# Allegro board EXTN.brd
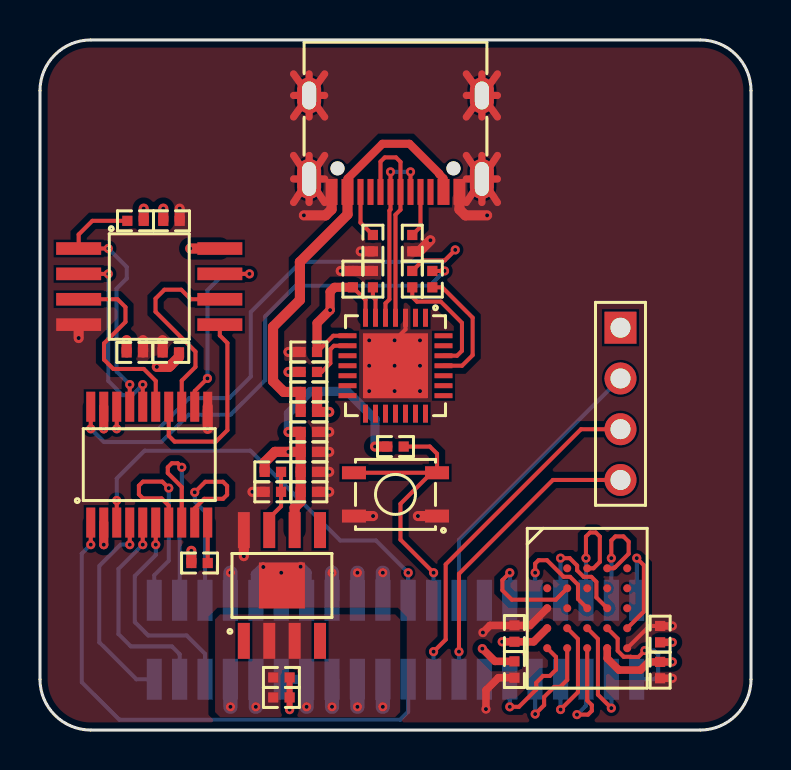
[diagram p0: board, top side]
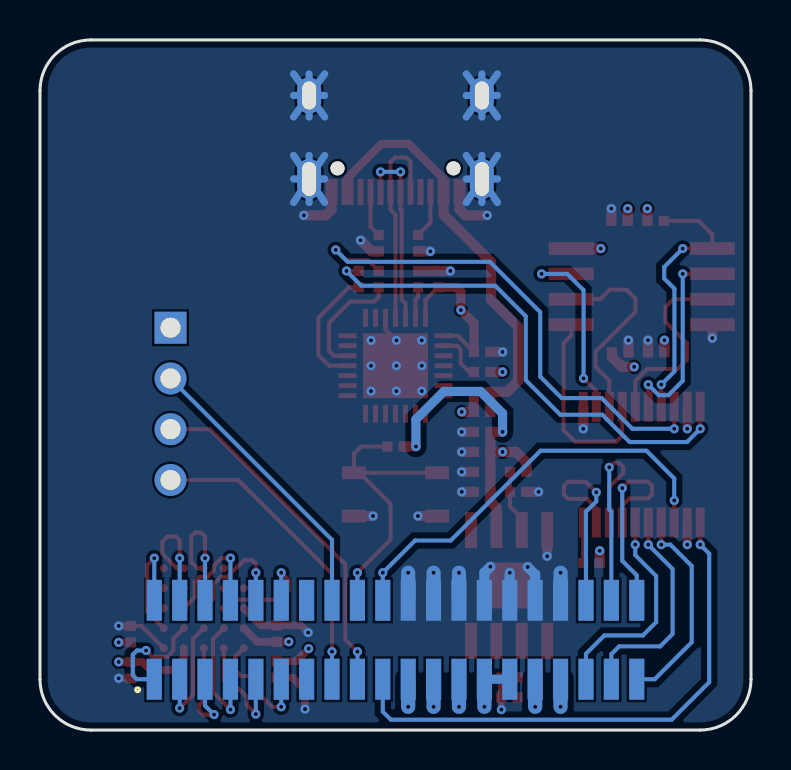
[diagram p1: board, bottom side, seen from below]

Outline 35.56 x 34.54 mm; copper layers: TOP, GND02, PWR03, BOTTOM. Coordinates in mm from the lower left corner of the outline.
Outline path: 0,32 0,2.54 arc(0.74,0.74) 2.54,0 33.02,0 arc(34.82,0.74) 35.56,2.54 35.56,32 arc(34.82,33.8) 33.02,34.54 2.54,34.54 arc(0.74,33.8) 0,32

## Design rules (mm)
net group 3V3_PL_UART_DIFF: nets 3V3_PL_UART_DN 3V3_PL_UART_DP
net group MG_3V3_FLASH: nets 3V3_PL_FLASH_CLK 3V3_PL_FLASH_HOLD 3V3_PL_FLASH_MISO 3V3_PL_FLASH_MOSI 3V3_PL_FLASH_WP
net group MG_FLASH: nets B35_L3_N B35_L3_P B35_L7_N B35_L7_P B35_L8_N B35_L8_P
net group MG_PSRAM: nets B35_L10_N B35_L10_P B35_L13_N B35_L13_P B35_L15_N B35_L15_P B35_L16_N B35_L16_P B35_L17_N B35_L17_P B35_L18_N B35_L18_P

## Placement (name value [footprint] x y rotation side)
C1  0.1uF  [C0402]  13.45 12.92 0 top
C2  0.1uF  [C0402]  13.45 11.92 0 top
C3  10uF  [C0402]  13.45 14.92 0 top
C4  1uF  [C0402]  12.07 2.63 0 top
C5  10uF  [C0402]  13.45 13.92 0 top
C6  10uF  [C0402]  12.07 1.63 0 top
C7  0.1uF  [C0402]  13.45 18.93 180 top
C8  1uF  [C0402]  15.65 22.57 90 top
C9  0.1uF  [C0402]  16.65 22.57 90 top
C10  0.1uF  [C0402]  31.01 3 270 top
C11  0.1uF  [C0402]  23.73 4.83 90 top
C12  10uF  [C0402]  31.01 4.8 90 top
C13  10uF  [C0402]  23.73 3.03 270 top
C14  0.1uF  [C0402]  6.58 25.49 0 top
C15  0.1uF  [C0402]  4.74 18.9 180 top
C16  0.1uF  [C0402]  6.54 18.9 180 top
J1  EXTN  [HDR4X1-2R54-TM-VM]  29.03 20.14 270 top
J2  USB_PL_UART  [USB-TYPEC-12-SM]  17.78 29.35 180 top
J3  PL_EXTN  [HDR20X2-1R27-SM-VF]  17.78 4.52 180 bottom
R1  26K  [R0402]  11.65 12.92 0 top
R2  0R  [R0402]  13.45 15.92 0 top
R3  0R  [R0402]  13.45 16.92 0 top
R4  10K  [R0402]  11.65 11.92 180 top
R5  0R  [R0402]  19.62 22.57 90 top
R6  0R  [R0402]  18.62 22.57 90 top
R7  10K  [R0402]  17.78 14.19 180 top
R8  4.7K  [R0402]  13.45 17.93 0 top
R9  5.1K  [R0402]  18.62 24.37 90 top
R10  5.1K  [R0402]  16.65 24.37 270 top
R11  10K  [R0402]  4.78 25.49 180 top
R12  4.7K  [R0402]  7.98 8.36 0 top
SW1  PL-KEY  [SW-4-1R20X0R65-SM]  17.78 11.79 180 top
U1  RT2515H  [SOIC-8-1R80X0R60-THRM]  12.1 7.24 0 top
U2  CP2102  [QFN-28-0R90X0R25]  17.78 18.24 270 top
U3  APS51208N-OBR  [BGA-24-0R40-8R00X6R00]  27.37 6.1 0 top
U4  W25Q128JVSIQ  [SOIC-8-2R25X0R63]  5.46 22.2 270 top
U5  TXS0108E  [TSSOP-20-1R50X0R45]  5.46 13.29 90 top

## Library data of the parts
C1-C16 = CAPACITOR-NON-POL
J1 = HEADER-4X1
J2 = USB_TYPEC
J3 = HEADER-20X2
R1-R12 = RESISTOR
SW1 = SW-KEY-4
U1 = RT2515H
U2 = CP2102
U3 = APS51208N-OBR
U4 = W25Q128JVSIQ
U5 = TXS0108E

## Footprints (pads in the part's own frame, mm; a bottom-side part is the same pattern mirrored in y, then rotated)
BGA-24-0R40-8R00X6R00
  round 0.4 smd: A2(-1,2) A3(0,2) A4(1,2) A5(2,2) B1(-2,1) B2(-1,1) B3(0,1) B4(1,1) B5(2,1) C1(-2,0) C2(-1,0) C3(0,0) C4(1,0) C5(2,0) D1(-2,-1) D2(-1,-1) D3(0,-1) D4(1,-1) D5(2,-1) E1(-2,-2) E2(-1,-2) E3(0,-2) E4(1,-2) E5(2,-2)
C0402
  rect 0.51x0.51 smd: 1(-0.41,0) 2(0.41,0)
HDR4X1-2R54-TM-VM
  rect 1.6x1.6 hole 1: 1(0,0)
  round 1.6 hole 1: 2(2.54,0) 3(5.08,0) 4(7.62,0)
HDR20X2-1R27-SM-VF
  rect 0.76x2.05 smd: 1(-12.065,-1.975) 2(-12.065,1.975) 3(-10.795,-1.975) 4(-10.795,1.975) 5(-9.525,-1.975) 6(-9.525,1.975) 7(-8.255,-1.975) 8(-8.255,1.975) 9(-6.985,-1.975) 10(-6.985,1.975) 11(-5.715,-1.975) 12(-5.715,1.975) 13(-4.445,-1.975) 14(-4.445,1.975) 15(-3.175,-1.975) 16(-3.175,1.975) 17(-1.905,-1.975) 18(-1.905,1.975) 19(-0.635,-1.975) 20(-0.635,1.975) 21(0.635,-1.975) 22(0.635,1.975) 23(1.905,-1.975) 24(1.905,1.975) 25(3.175,-1.975) 26(3.175,1.975) 27(4.445,-1.975) 28(4.445,1.975) 29(5.715,-1.975) 30(5.715,1.975) 31(6.985,-1.975) 32(6.985,1.975) 33(8.255,-1.975) 34(8.255,1.975) 35(9.525,-1.975) 36(9.525,1.975) 37(10.795,-1.975) 38(10.795,1.975) 39(12.065,-1.975) 40(12.065,1.975)
QFN-28-0R90X0R25
  rect 0.9x0.25 smd: 1(-2.4,1.5) 2(-2.4,1) 3(-2.4,0.5) 4(-2.4,0) 5(-2.4,-0.5) 6(-2.4,-1) 7(-2.4,-1.5) 15(2.4,-1.5) 16(2.4,-1) 17(2.4,-0.5) 18(2.4,0) 19(2.4,0.5) 20(2.4,1) 21(2.4,1.5)
  rect 0.25x0.9 smd: 8(-1.5,-2.4) 9(-1,-2.4) 10(-0.5,-2.4) 11(0,-2.4) 12(0.5,-2.4) 13(1,-2.4) 14(1.5,-2.4) 22(1.5,2.4) 23(1,2.4) 24(0.5,2.4) 25(0,2.4) 26(-0.5,2.4) 27(-1,2.4) 28(-1.5,2.4)
  rect 3.25x3.25 smd: 29(0,0)
R0402
  rect 0.51x0.51 smd: 1(-0.41,0) 2(0.41,0)
SOIC-8-1R80X0R60-THRM
  rect 0.6x1.8 smd: 1(-1.905,-2.772) 2(-0.635,-2.772) 3(0.635,-2.772) 4(1.905,-2.772) 5(1.905,2.772) 6(0.635,2.772) 7(-0.635,2.772) 8(-1.905,2.772)
  rect 2.3x2.3 smd: 9(0,0)
SOIC-8-2R25X0R63
  rect 0.63x2.25 smd: 1(-1.905,-3.53) 2(-0.635,-3.53) 3(0.635,-3.53) 4(1.905,-3.53) 5(1.905,3.53) 6(0.635,3.53) 7(-0.635,3.53) 8(-1.905,3.53)
SW-4-1R20X0R65-SM
  rect 1.2x0.65 smd: 1(-2.078,1.083) 2(2.077,1.083) 3(-2.078,-1.083) 4(2.077,-1.083)
TSSOP-20-1R50X0R45
  rect 1.5x0.45 smd: 1(-2.9,2.925) 2(-2.9,2.275) 3(-2.9,1.625) 4(-2.9,0.975) 5(-2.9,0.325) 6(-2.9,-0.325) 7(-2.9,-0.975) 8(-2.9,-1.625) 9(-2.9,-2.275) 10(-2.9,-2.925) 11(2.9,-2.925) 12(2.9,-2.275) 13(2.9,-1.625) 14(2.9,-0.975) 15(2.9,-0.325) 16(2.9,0.325) 17(2.9,0.975) 18(2.9,1.625) 19(2.9,2.275) 20(2.9,2.925)
USB-TYPEC-12-SM
  oval 1.2x2 hole 0.7x1.7: 1(-4.32,1.765) 2(4.32,1.765)
  oval 1.2x1.8 hole 0.7x1.4: 3(-4.32,-2.415) 4(4.32,-2.415)
  round 0.71 hole 0.7: 5(-2.9,1.235) 6(2.9,1.235)
  rect 0.6x1.3 smd: A1B12(-3.2,2.415) A4B9(-2.4,2.415) B1A12(3.2,2.415) B4A9(2.4,2.415)
  rect 0.3x1.3 smd: A5(-1.25,2.415) A6(-0.25,2.415) A7(0.25,2.415) A8(1.25,2.415) B5(1.75,2.415) B6(0.75,2.415) B7(-0.75,2.415) B8(-1.75,2.415)

## Nets
3V3_PL_FLASH_CLK: U4.6(CLK) U5.13(B7)
3V3_PL_FLASH_CS: R11.2 U4.1(C\S\) U5.17(B3)
3V3_PL_FLASH_HOLD: U4.7(H\O\L\D\) U5.12(B8)
3V3_PL_FLASH_MISO: U4.2(DO) U5.16(B4)
3V3_PL_FLASH_MOSI: U4.5(DI) U5.14(B6)
3V3_PL_FLASH_WP: U4.3(W\P\) U5.15(B5)
3V3_PL_UART_DN: J2.A7(DN1) J2.B7(DN2) U2.5(D-)
3V3_PL_UART_DP: J2.A6(DP1) J2.B6(DP2) U2.4(D+)
3V3_PL_UART_RX: R6.2 U5.18(B2)
3V3_PL_UART_TX: R5.2 U5.20(B1)
GND: C1.2 C2.2 C3.2 C4.2 C5.2 C6.2 C7.2 C8.2 C9.2 C10.2 C11.2 C12.2 C13.2 C14.2 C15.1 C16.2 J2.1(EP1) J2.2(EP2) J2.3(EP3) J2.4(EP4) J2.A1B12(GND#A1B12) J2.B1A12(GND#B1A12) J3.22 J3.24 J3.26 J3.28 J3.30 J3.32 J3.34 R4.2 R9.1 R10.2 SW1.1 SW1.2 U1.8(GND#8) U1.9(GND#9) U2.3(GND#3) U2.29(GND#29) U3.C1(VSS#C1) U3.E5(VSS#E5) U4.4(GND) U5.11(GND)
VCC_1V8: C1.1 C2.1 C3.1 C5.1 C10.1 C11.1 C12.1 C13.1 C15.2 R1.1 R7.2 R12.1 U1.6(VOUT) U3.D1(VDD#D1) U3.E4(VDD#E4) U5.2(VCCA)
VCC_3V3: C4.1 C6.1 C14.1 C16.1 J3.21 J3.23 J3.25 J3.27 J3.29 J3.31 J3.33 R11.1 U1.2(EN) U1.3(VIN) U4.8(VCC) U5.19(VCCB)
B35_L3_N: J3.37 U5.5(A4)
B35_L3_P: J3.38 U5.8(A7)
B35_L7_N: J3.39 U5.4(A3)
B35_L7_P: J3.40 U5.7(A6)
B35_L8_N: J3.35 U5.6(A5)
B35_L8_P: J3.36 U5.9(A8)
B35_L9_N: J1.3 J3.17
B35_L9_P: J3.18 R7.1 SW1.3 SW1.4
B35_L10_N: J3.12 U3.B2(CLK)
B35_L10_P: J3.11 U3.E1(ADQ7)
B35_L11_N: J1.4 J3.15
B35_L11_P: J1.2 J3.16
B35_L12_N: J3.19 U5.1(A1)
B35_L12_P: J3.20 U5.3(A2)
B35_L13_N: J3.10 U3.C3(DQS/DM)
B35_L13_P: J3.9 U3.E2(ADQ6)
B35_L15_N: J3.4 U3.A4(R\S\T\)
B35_L15_P: J3.3 U3.D3(ADQ0)
B35_L16_N: J3.6 U3.A3(C\E\)
B35_L16_P: J3.5 U3.E3(ADQ5)
B35_L17_N: J3.8 U3.C4(ADQ2)
B35_L17_P: J3.7 U3.D2(ADQ1)
B35_L18_N: J3.2 U3.D5(ADQ4)
B35_L18_P: J3.1 U3.D4(ADQ3)
PL_UART_VBUS: J2.A4B9(VBUS#A4B9) J2.B4A9(VBUS#B4A9) R2.1 R3.1
N624567: R1.2 R4.1 U1.7(ADJ)
N1096893: R12.2 U5.10(OE)
N1592788: C7.1 C8.1 R2.2 R3.2 R8.1 U2.7(REGIN) U2.8(VBUS)
N1592792: R8.2 U2.9(R\S\T\)
N1592870: R5.1 U2.25(RXD)
N1593010: R6.1 U2.26(TXD)
N1593134: C9.1 U2.6(VDD)
N1593294: J2.B5(CC2) R10.1
N1593302: J2.A5(CC1) R9.2

Pads without a net: J1 1; J2 5 6 A8 B8; J3 13 14; U1 1 4 5; U2 1 2 10 11 12 13 14 15 16 17 18 19 20 21 22 23 24 27 28; U3 A2 A5 B1 B3 B4 B5 C2 C5

## Via types
v1: diameter 0.457, hole 0.203, TOP to BOTTOM, 100 vias

## Routing (per net, layer and track width the routed paths; a pad name or vN(x,y) marks a point on that pad's centre or on a via; arc(x,y) is an arc through that point)
3V3_PL_FLASH_CLK: length 10.1
  TOP w0.203: U5.13 7.09,17.49 7.77,18.18 7.77,18.94 5.78,20.94 5.78,21.6 6.22,22.04 7.07,22.04 7.55,21.56 U4.6
3V3_PL_FLASH_CS: length 13.7
  TOP w0.203: U5.17 v1(4.49,17.29) ; R11.2 2.62,25.49 1.93,24.81 U4.1 v1(3.41,24.1)
  BOTTOM w0.203: v1(3.41,24.1) 4.34,23.18 4.34,22.6 3.83,22.09 3.83,17.95 v1(4.49,17.29)
3V3_PL_FLASH_HOLD: length 10
  TOP w0.203: v1(8.37,17.6) 7.74,16.97 U5.12 ; U4.7 v1(10.47,22.83)
  BOTTOM w0.203: v1(10.47,22.83) 9.19,22.83 8.37,22.02 v1(8.37,17.6)
3V3_PL_FLASH_MISO: length 10.2
  TOP w0.203: U4.2 v1(3.41,22.83) ; U5.16 v1(5.14,17.29)
  BOTTOM w0.203: v1(3.41,22.83) 3.41,17.48 4.13,16.76 4.61,16.76 v1(5.14,17.29)
3V3_PL_FLASH_MOSI: length 10.2
  TOP w0.203: U5.14 6.44,14.73 6.73,14.44 8.8,14.44 9.37,15.01 9.37,19.37 8.99,19.75 U4.5
3V3_PL_FLASH_WP: length 9.9
  TOP w0.203: U4.3 3.88,21.56 4.27,21.17 4.27,20.43 3.2,19.36 3.2,18.54 3.67,18.07 5.19,18.07 5.79,17.48 U5.15
3V3_PL_UART_DN: length 9.4
  TOP w0.203: v1(17.53,27.94) J2.A7 17.53,26.06 17.48,26 17.48,21.56 17.28,21.36 U2.5 ; J2.B7 v1(18.53,27.94)
  BOTTOM w0.203: v1(17.53,27.94) v1(18.53,27.94)
3V3_PL_UART_DP: length 10.6
  TOP w0.203: U2.4 17.78,25.8 18.03,26.05 J2.A6 18.03,28.44 17.81,28.66 17.24,28.66 17.03,28.45 J2.B6
3V3_PL_UART_RX: length 26.2
  TOP w0.203: U5.18 v1(3.84,15.08) ; R6.2 19.15,23.51 20.25,23.51 v1(20.77,24.03)
  BOTTOM w0.203: v1(3.84,15.08) 5.93,15.08 7.47,16.62 9.47,16.62 10.54,17.69 10.54,20.92 13.06,23.44 20.17,23.44 v1(20.77,24.03)
3V3_PL_UART_TX: length 25.1
  TOP w0.203: U5.20 v1(2.54,15.08) ; R5.2 v1(20.23,22.98)
  BOTTOM w0.203: v1(20.23,22.98) 19.49,22.24 12.8,22.24 11.26,20.71 11.26,17.51 9.53,15.78 7.43,15.78 6.07,14.42 3.2,14.42 v1(2.54,15.08)
GND: length 153.4
  TOP w0.203: U2.3 18.28,20.05 v1(17.74,19.51) ; U3.E5 30.48,5.21 C12.2
  TOP w0.305: C4.2 C6.2 v1(12.48,1.02)
  TOP w0.356: J2.2 14.24,27.59 ; J2.2 12.68,26.41 ; J2.2 12.68,27.59 ; J2.2 13.46,26.41 ; J2.2 12.68,28.76 ; J2.2 14.24,26.41 ; J2.2 13.46,28.76 ; J2.2 14.24,28.76 ; J2.3 22.88,31.77 ; J2.3 22.1,32.84 ; J2.3 21.32,31.77 ; J2.3 21.32,30.69 ; J2.3 22.88,30.69 ; J2.3 22.88,32.84 ; J2.3 21.32,32.84 ; J2.3 22.1,30.69 ; 12.68,31.77 J2.4 ; J2.4 13.46,32.84 ; J2.4 14.24,32.84 ; J2.4 14.24,31.77 ; J2.4 14.24,30.69 ; J2.4 12.68,32.84 ; J2.4 12.68,30.69 ; J2.4 13.46,30.69 ; J2.1 22.88,28.76 ; J2.1 21.32,26.41 ; J2.1 22.1,26.41 ; J2.1 22.88,27.59 ; J2.1 22.88,26.41 ; J2.1 22.1,28.76 ; J2.1 21.32,28.76 ; J2.1 21.32,27.59
  TOP w0.381: U3.C1 24.51,5.24 C11.2 22.51,5.24 v1(22.15,4.88) ; C12.2 v1(31.62,5.21) ; v1(22.3,1.05) 22.3,1.99 22.93,2.62 C13.2 ; C10.2 v1(31.62,2.59)
  TOP w0.508: C7.2 v1(12.43,18.93) ; U4.4 v1(1.93,19.62) ; C15.1 v1(5.15,19.51) ; C16.2 v1(6.13,19.51) ; C14.2 v1(6.99,26.1) ; C2.2 v1(14.47,11.92) ; C9.2 C8.2 v1(15.04,22.98) ; R10.2 v1(16.04,23.96) ; J2.A1B12 20.98,26.06 21.27,25.76 v1(22.36,25.76) ; U5.11 v1(8.39,15.08) ; J2.B1A12 14.58,26.06 14.29,25.76 v1(13.2,25.76) ; R9.1 18.97,23.96 v1(19.53,24.52) ; C5.2 v1(14.47,13.92) ; SW1.2 v1(16.66,10.71) ; C1.2 v1(14.47,12.92) ; C3.2 v1(14.47,14.92) ; R4.2 v1(10.63,11.92) ; SW1.1 v1(18.9,10.71) ; U1.8 v1(10.19,8.7)
  GND02 w0.356: 22.1,30.69 J2.3 ; J2.3 22.88,32.84 ; J2.3 22.88,31.77 ; J2.3 22.1,32.84 ; J2.3 22.88,30.69 ; J2.3 21.32,32.84 ; J2.3 21.32,31.77 ; J2.3 21.32,30.69 ; 12.68,26.41 J2.2 ; J2.2 14.24,28.76 ; J2.2 14.24,26.41 ; J2.2 13.46,26.41 ; J2.2 12.68,28.76 ; J2.2 13.46,28.76 ; J2.2 12.68,27.59 ; J2.2 14.24,27.59 ; 22.1,26.41 J2.1 ; J2.1 22.88,26.41 ; J2.1 21.32,26.41 ; J2.1 21.32,28.76 ; J2.1 22.1,28.76 ; J2.1 22.88,28.76 ; J2.1 21.32,27.59 ; J2.1 22.88,27.59 ; J2.4 14.24,30.69 ; J2.4 13.46,32.84 ; J2.4 12.68,31.77 ; J2.4 13.46,30.69 ; J2.4 14.24,31.77 ; J2.4 12.68,32.84 ; J2.4 12.68,30.69 ; J2.4 14.24,32.84
  BOTTOM w0.356: J2.2 14.24,28.76 ; J2.2 13.46,26.41 ; J2.2 14.24,27.59 ; J2.2 14.24,26.41 ; J2.2 12.68,26.41 ; J2.2 12.68,27.59 ; J2.2 13.46,28.76 ; J2.2 12.68,28.76 ; 21.32,32.84 J2.3 ; J2.3 21.32,31.77 ; J2.3 22.1,30.69 ; J2.3 21.32,30.69 ; J2.3 22.88,31.77 ; J2.3 22.88,30.69 ; J2.3 22.88,32.84 ; J2.3 22.1,32.84 ; J2.1 22.88,28.76 ; J2.1 21.32,28.76 ; J2.1 21.32,26.41 ; J2.1 21.32,27.59 ; J2.1 22.88,27.59 ; J2.1 22.1,28.76 ; J2.1 22.1,26.41 ; J2.1 22.88,26.41 ; 12.68,32.84 J2.4 ; J2.4 14.24,31.77 ; J2.4 14.24,32.84 ; J2.4 13.46,30.69 ; J2.4 13.46,32.84 ; J2.4 14.24,30.69 ; J2.4 12.68,30.69 ; J2.4 12.68,31.77
  BOTTOM w0.508: J3.32 10.79,7.79 v1(11.17,8.16) ; v1(13.03,8.18) 13.34,7.88 J3.28 ; 12.06,6.49 v1(12.06,7.87)
  BOTTOM w0.711: J3.24 v1(15.88,7.87) ; J3.34 v1(9.53,7.87) ; J3.26 v1(14.61,7.87) ; J3.22 v1(17.14,7.87)
  vias: v1(16.47,19.51) v1(16.47,18.24) v1(16.47,16.97) v1(17.74,18.24) v1(17.74,16.97) v1(19.01,19.51) v1(19.01,18.24) v1(19.01,16.97)
VCC_1V8: length 76.7
  TOP w0.381: v1(23.12,4.42) C11.1 24.69,4.42 U3.D1 ; v1(22.12,4.07) 22.76,3.44 C13.1 ; U3.E4 28.37,3.59 28.95,3 30.03,3 30.44,3.41 C10.1 v1(31.62,3.41) ; C12.1 v1(31.62,4.39)
  TOP w0.457: U5.2 v1(3.19,9.28)
  TOP w0.508: R12.1 v1(7.57,8.97) ; C5.1 C1.1 C2.1 13.04,11.44 12.73,11.14 U1.6 ; C5.1 v1(12.43,13.92) 11.75,13.92 11.24,13.41 R1.1 ; C5.1 C3.1 v1(12.43,14.92) ; C15.2 v1(4.33,19.51) ; R7.2 v1(16.76,14.19)
  PWR03 w0.457: v1(4.33,19.51) 1.92,17.1 1.92,11.13 3.19,9.86 v1(3.19,9.28) 4.23,8.24 6.84,8.24 v1(7.57,8.97) 9.15,8.97 12.43,12.25 v1(12.43,13.92) ; v1(31.62,3.41) v1(31.62,4.39) 31.04,4.39 30.35,5.08 23.78,5.08 v1(23.12,4.42) 22.77,4.07 v1(22.12,4.07) 21.23,4.96 21.23,10.6 17.64,14.19 v1(16.76,14.19)
  BOTTOM w0.457: v1(16.76,14.19) 16.76,15.55 15.36,16.95 13.52,16.95 12.43,15.85 v1(12.43,14.92)
VCC_3V3: length 14.9
  TOP w0.457: U5.19 v1(3.19,15.08)
  TOP w0.508: U4.8 v1(7.51,24.1) ; R11.1 v1(5.19,26.1) ; C16.1 6.95,18.68 6.55,18.27 6.54,18.27 6.45,18.18 v1(5.84,18.18) ; C14.1 v1(6.17,26.1)
  BOTTOM w0.457: 12.06,2.54 J3.27
  BOTTOM w0.711: J3.23 v1(15.88,1.16) ; J3.33 v1(9.53,1.16) ; J3.27 v1(13.34,1.16) ; J3.21 v1(17.14,1.16) ; J3.25 v1(14.61,1.16) ; J3.31 v1(10.79,1.16)
B35_L3_N: length 10.8
  TOP w0.203: U5.5 v1(5.14,9.28)
  BOTTOM w0.203: v1(5.14,9.28) 3.93,8.07 3.93,4.8 4.54,4.19 6.6,4.19 6.99,3.8 6.99,2.54
B35_L3_P: length 10.6
  TOP w0.203: v1(7.09,13.15) 7.09,13.15 6.89,13.36 6.59,13.36 6.39,13.15 6.39,12.87 7.09,12.17 U5.8
  BOTTOM w0.203: v1(7.09,13.15) 7.09,11.03 6.99,10.93 6.99,6.49
B35_L7_N: length 10.4
  TOP w0.203: U5.4 v1(4.49,9.28)
  BOTTOM w0.203: v1(4.49,9.28) 4.03,9.28 2.97,8.22 2.97,4.39 4.81,2.54 J3.39
B35_L7_P: length 10.6
  TOP w0.203: U5.7 6.44,11.23 6.08,11.59 5.15,11.59 4.95,11.8 4.95,12.23 5.15,12.44 6.12,12.44 v1(6.44,12.11)
  BOTTOM w0.203: v1(6.44,12.11) 6.44,8.47 5.71,7.75 J3.40
B35_L8_N: length 10.9
  TOP w0.203: U5.6 v1(5.79,9.28)
  BOTTOM w0.203: J3.35 8.26,3.82 7.34,4.73 5.41,4.73 4.74,5.4 4.74,7.71 5.79,8.76 v1(5.79,9.28)
B35_L8_P: length 10.6
  TOP w0.203: v1(7.74,11.9) 8.27,12.43 9.15,12.43 9.36,12.22 9.36,11.78 9.16,11.58 8.21,11.58 7.74,11.1 U5.9
  BOTTOM w0.203: J3.36 8.26,10.93 7.74,11.44 v1(7.74,11.9)
B35_L9_N: length 17.5
  TOP w0.203: J1.3 27.06,15.06 20.29,8.29 20.29,4.53 v1(19.68,3.92)
  BOTTOM w0.203: 19.68,2.54 v1(19.68,3.92)
B35_L9_P: length 14.6
  TOP w0.203: 19.58,12.88 18.03,11.32 18.03,9.53 v1(19.68,7.87) ; 19.58,12.88 SW1.4 ; 19.58,12.88 SW1.3 19.86,13.83 19.5,14.19 R7.1
  BOTTOM w0.203: 19.68,6.49 v1(19.68,7.87)
B35_L10_N: length 6.1
  TOP w0.203: U3.B2 25.8,6.53 23.6,6.53 23.13,7 23.13,7.5 v1(23.5,7.87)
  BOTTOM w0.203: J3.12 v1(23.5,7.87)
B35_L10_P: length 5.9
  TOP w0.203: v1(23.5,1.16) 23.95,1.16 24.82,2.03 24.82,2.37 25.16,2.71 25.5,2.71 25.81,3.02 25.81,3.66 U3.E1
  BOTTOM w0.203: J3.11 v1(23.5,1.16)
B35_L11_N: length 15.3
  TOP w0.203: v1(20.95,3.92) 20.95,7.82 25.65,12.52 J1.4
  BOTTOM w0.203: J3.15 v1(20.95,3.92)
B35_L11_P: length 14.5
  BOTTOM w0.203: J3.16 20.95,9.52 J1.2
B35_L12_N: length 27.1
  TOP w0.203: U5.1 v1(2.54,9.28)
  BOTTOM w0.203: J3.19 18.41,0.92 18.01,0.52 3.97,0.52 2.09,2.4 2.09,8.83 v1(2.54,9.28)
B35_L12_P: length 21.3
  TOP w0.203: U5.3 v1(3.84,11.49)
  BOTTOM w0.203: J3.20 v1(18.41,7.87) 16.8,9.49 15.02,9.49 10.52,13.98 5.23,13.98 3.84,12.59 v1(3.84,11.49)
B35_L13_N: length 5.9
  TOP w0.203: U3.C3 26.91,6.56 26.91,7.27 26.51,7.67 26.19,7.67 25.36,8.5 24.93,8.5 24.77,8.33 v1(24.77,7.87)
  BOTTOM w0.203: J3.10 v1(24.77,7.87)
B35_L13_P: length 5.9
  TOP w0.203: U3.E2 26.37,2.51 26.02,2.16 25.72,2.16 25.21,1.66 25.21,1.25 v1(24.77,0.8)
  BOTTOM w0.203: J3.9 v1(24.77,0.8)
B35_L15_N: length 6
  TOP w0.203: U3.A4 28.69,8.1 28.74,8.15 28.76,8.15 29.44,8.82 29.44,9.43 29.18,9.69 28.78,9.69 28.57,9.49 v1(28.57,8.61)
  BOTTOM w0.203: J3.4 v1(28.57,8.61)
B35_L15_P: length 5.9
  TOP w0.203: U3.D3 27.9,4.56 27.9,1.77 v1(28.57,1.1)
  BOTTOM w0.203: J3.3 v1(28.57,1.1)
B35_L16_N: length 6.1
  TOP w0.203: 27.3,8.6 v1(27.3,8.61) 27.3,9.68 27.51,9.89 27.8,9.89 28,9.68 28,8.41 27.68,8.1 U3.A3
  BOTTOM w0.203: J3.6 v1(27.3,8.61)
B35_L16_P: length 6
  TOP w0.203: v1(26.86,0.77) 27.41,0.77 27.6,0.96 27.6,1.25 27.37,1.48 U3.E3
  BOTTOM w0.203: J3.5 27.3,1.22 v1(26.86,0.77)
B35_L17_N: length 6.1
  TOP w0.203: U3.C4 27.83,6.64 27.83,7.42 27.58,7.67 27.19,7.67 26.86,7.99 26.86,8.23 26.49,8.61 v1(26.04,8.61)
  BOTTOM w0.203: J3.8 v1(26.04,8.61)
B35_L17_P: length 6.2
  TOP w0.203: v1(26.04,1.03) 26.9,1.9 26.9,4.56 U3.D2
  BOTTOM w0.203: J3.7 v1(26.04,1.03)
B35_L18_N: length 6.1
  TOP w0.203: v1(29.84,8.61) 30.2,8.25 30.2,5.93 U3.D5
  BOTTOM w0.203: J3.2 v1(29.84,8.61)
B35_L18_P: length 5.9
  TOP w0.203: v1(30.25,3.98) 29.93,3.66 29.56,3.66 29.55,3.67 29.19,3.67 28.89,3.97 28.89,4.57 U3.D4
  BOTTOM w0.203: v1(30.25,3.98) 30.71,3.98 30.92,3.77 30.92,2.75 30.72,2.54 J3.1
PL_UART_VBUS: length 21.2
  TOP w0.406: J2.A4B9 20.18,27.61 19.97,27.82 19.97,27.85 18.48,29.34 17.13,29.34 15.38,27.6 J2.B4A9
  TOP w0.508: R2.1 R3.1 12.2,16.92 11.65,17.47 11.65,20.18 13,21.53 13,23.43 15.38,25.81 J2.B4A9
N624567: length 3.2
  TOP w0.203: R1.2 R4.1 12.06,11.2 11.46,10.61 U1.7
N1096893: length 2
  TOP w0.203: U5.10 R12.2
N1592788: length 18.7
  TOP w0.203: C8.1 16.28,21.53 U2.7 ; C7.1 14.67,19.74 U2.8
  TOP w0.457: C8.1 14.73,22.16 14.51,21.94 v1(14.51,21.02) 13.86,20.37 C7.1
  TOP w0.508: R3.2 R2.2 v1(14.47,15.92) ; R8.1 v1(12.43,17.93)
  PWR03 w0.457: v1(14.47,15.92) 12.79,17.6 12.75,17.6 v1(12.43,17.93) 11.83,18.52 11.83,19.98 12.87,21.02 v1(14.51,21.02)
N1592792: length 2.5
  TOP w0.203: R8.2 14.09,17.93 14.52,18.36 14.52,19.06 14.7,19.24 U2.9
N1592870: length 6.2
  TOP w0.203: U2.25 21.11,18.24 21.64,18.77 21.64,20.64 20.12,22.16 R5.1
N1593010: length 5.9
  TOP w0.203: U2.26 20.86,18.74 21.1,18.98 21.1,20.38 20.04,21.45 18.85,21.45 18.62,21.68 R6.1
N1593134: length 1.6
  TOP w0.203: C9.1 16.65,21.68 16.78,21.55 U2.6
N1593294: length 2.4
  TOP w0.203: R10.1 16.03,25.4 J2.B5
N1593302: length 2.3
  TOP w0.203: J2.A5 19.03,25.19 R9.2

## Copper pours and planes (outline as drawn; the poured copper is in the pictures)
GND on TOP: 2.54,0.38 1.01,1.01 0.38,2.54 0.38,32 1.01,33.53 2.54,34.16 33.02,34.16 34.55,33.53 35.18,32 35.18,2.54 34.55,1.01 33.02,0.38 ; 3 cut-outs
GND on BOTTOM: 2.54,0.38 1.01,1.01 0.38,2.54 0.38,32 1.01,33.53 2.54,34.16 33.02,34.16 34.55,33.53 35.18,32 35.18,2.54 34.55,1.01 33.02,0.38 ; 2 cut-outs
GND on GND02: 2.54,0.38 1.01,1.01 0.38,2.54 0.38,32 1.01,33.53 2.54,34.16 33.02,34.16 34.55,33.53 35.18,32 35.18,2.54 34.55,1.01 33.02,0.38
VCC_3V3 on TOP: 9.01,0.64 17.76,0.64 18.01,0.9 18.01,5.54 17.76,5.79 9.01,5.79 8.76,5.54 8.76,0.9
VCC_3V3 on PWR03: 2.54,0.38 1.01,1.01 0.38,2.54 0.38,32 1.01,33.53 2.54,34.16 33.02,34.16 34.55,33.53 35.18,32 35.18,2.54 34.55,1.01 33.02,0.38

## Text on the board
NCLEGEND-1-4: FIGURE | SIZE | 8.0 | 27.56 | 39.37 | 55.12x27.56 | 66.93x27.56 | DRILL CHART: TOP to BOTTOM | ALL UNITS ARE IN MILS | PLATED | QTY | 100 | 2 | 4
